# Allegro board prototype_board1_rev2.brd
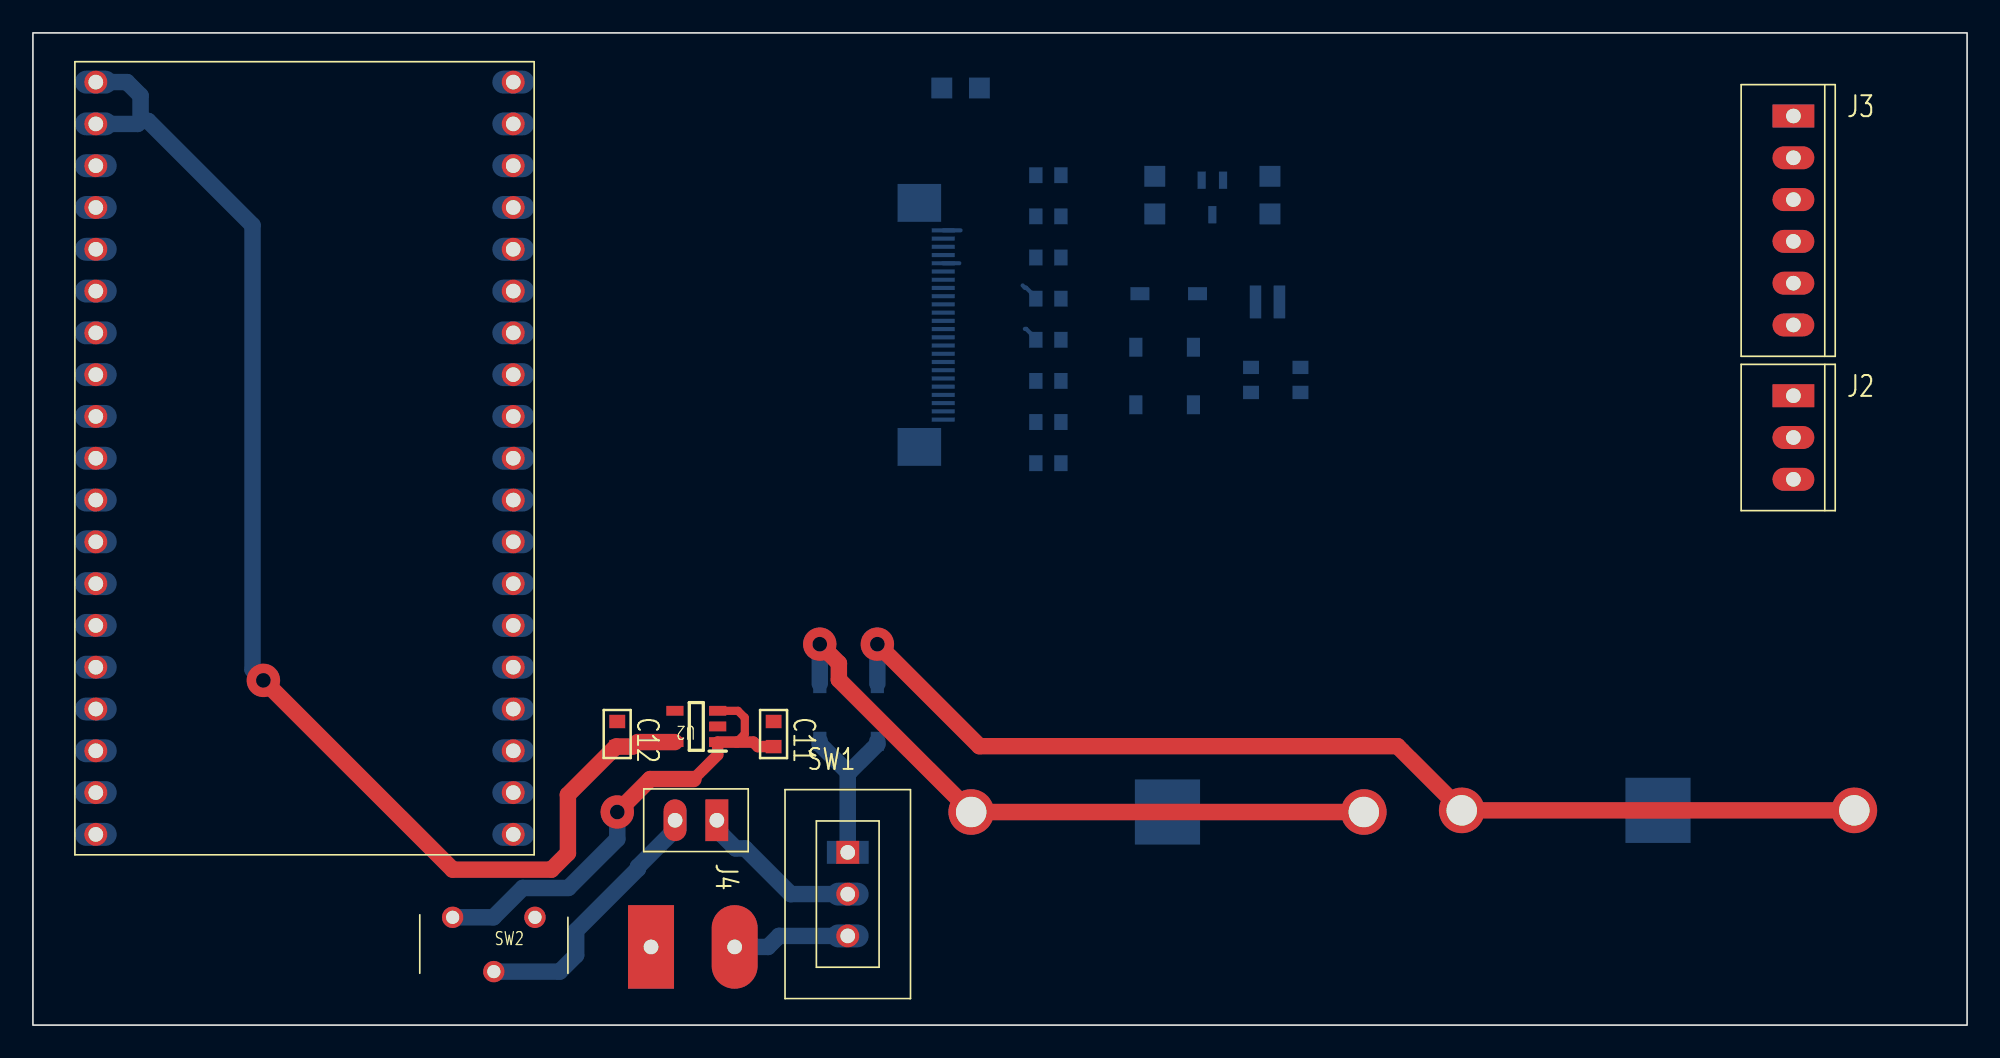
[diagram p0: board, top side]
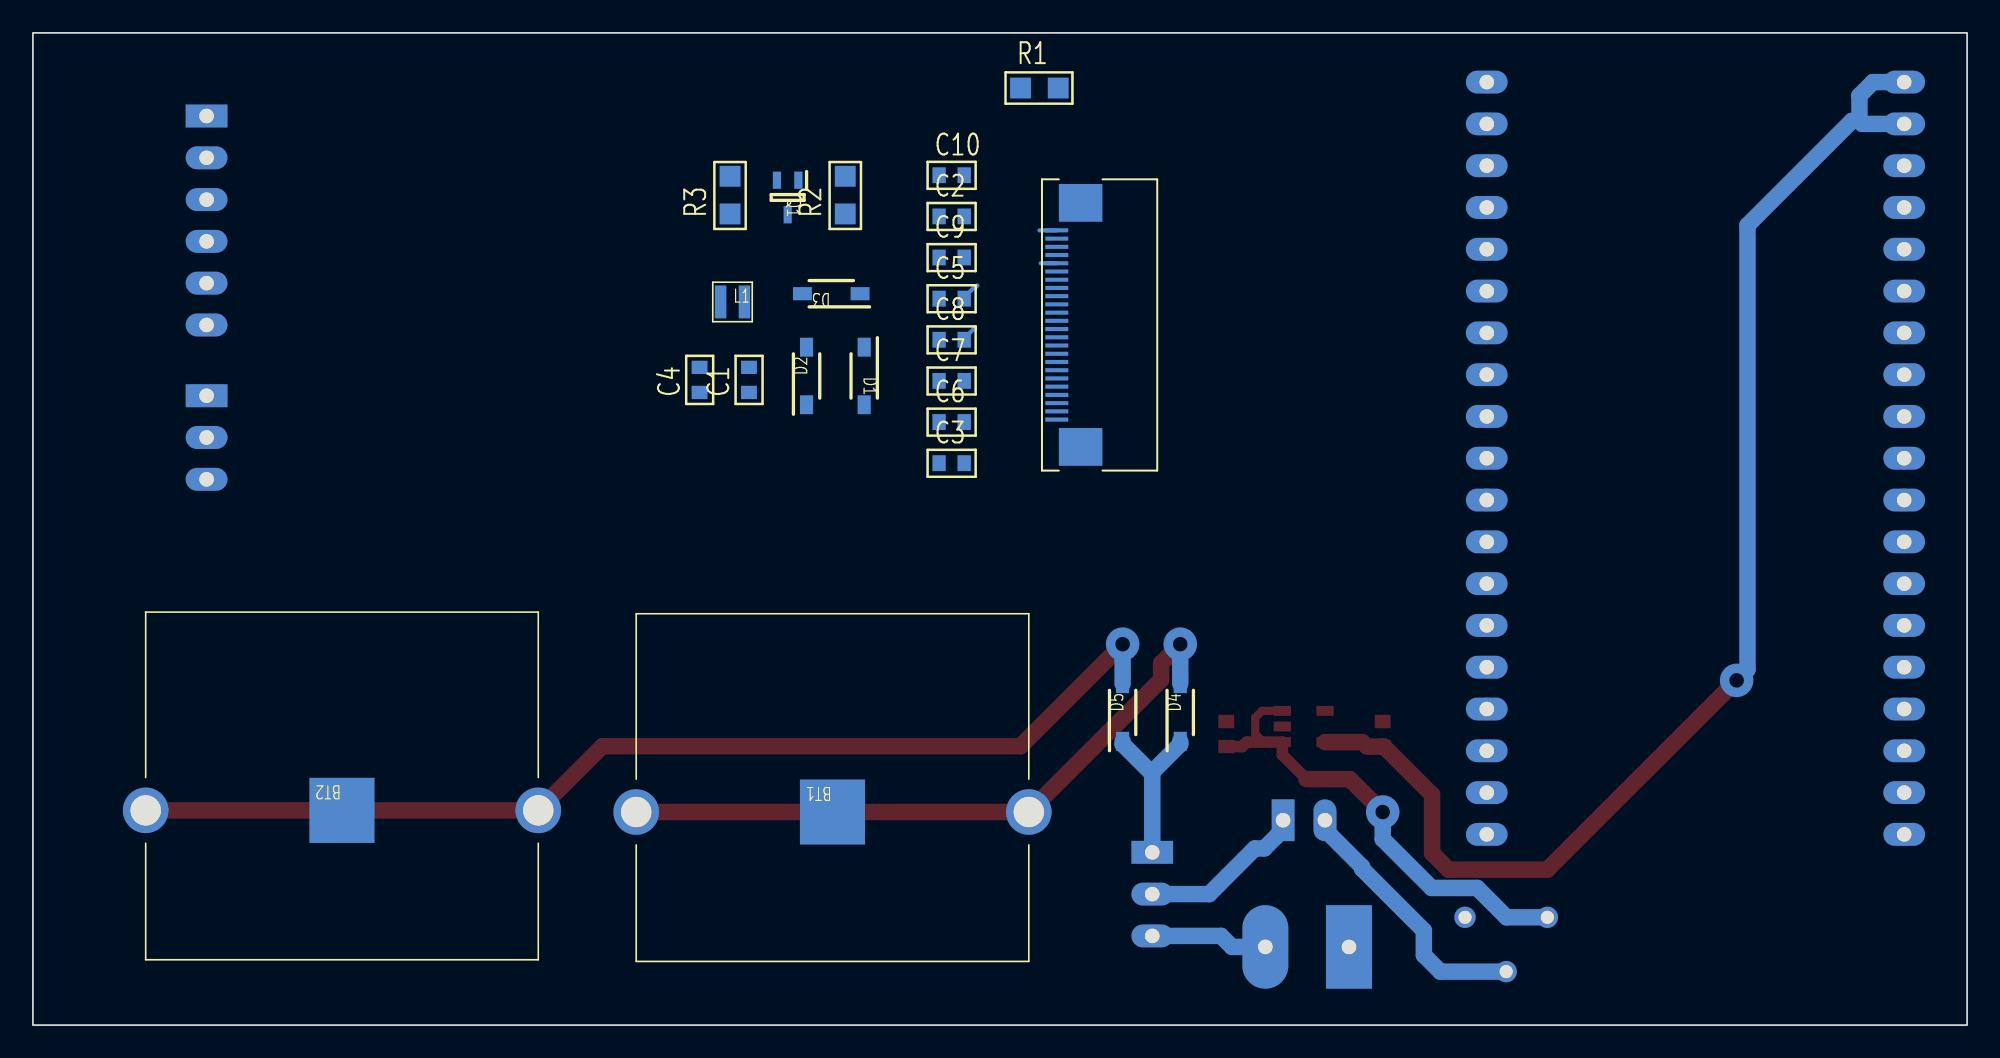
[diagram p1: board, bottom side, seen from below]

Outline 117.5 x 60.3 mm; copper layers: TOP, BOTTOM. Coordinates in mm from the lower left corner of the outline.
Outline path: rectangle 0,0 117.5,60.3

## Design rules (mm)
constraint set DEFAULT: min track width 0.254

## Placement (name value [footprint] x y rotation side)
BT1  Battery_Holder  [30212]  57 12.95 0 bottom
BT2  Battery_Holder  [30212]  86.8 13.05 0 bottom
C1  1u  [GU-C0603]  74 38.45 90 bottom
C2  1u / 50V  [GU-C0603]  62.45 49.15 180 bottom
C3  1u / 25V  [GU-C0603]  62.45 34.15 180 bottom
C4  4.7u  [GU-C0603]  77 38.45 90 bottom
C5  1u / 50V  [GU-C0603]  62.45 44.15 180 bottom
C6  1u / 25V  [GU-C0603]  62.45 36.65 180 bottom
C7  1u / 25V  [GU-C0603]  62.45 39.15 180 bottom
C8  1u / 25V  [GU-C0603]  62.45 41.65 180 bottom
C9  1u / 25V  [GU-C0603]  62.45 46.65 180 bottom
C10  1u / 25V  [GU-C0603]  62.45 51.65 180 bottom
C11  1u  [GU-C0603]  45 18.45 270 top
C12  1u  [GU-C0603]  35.5 18.45 270 top
D1  MBR0530T1  [SOD3716X135N]  67 39.45 270 bottom
D2  MBR0530T1  [SOD3716X135N]  70.5 39.45 90 bottom
D3  MBR0530T1  [SOD3716X135N]  69 44.45 0 bottom
D4  MBR0530T1  [SOD3716X135N]  47.8 19 90 bottom
D5  MBR0530T1  [SOD3716X135N]  51.3 19 90 bottom
J1  SFV24R-4STE1HLF  [AMPHENOL_SFV24R-4STE1HLF]  49.2 33.7 90 bottom
J2  VOLT TP  [GU-MOLEX3]  106.95 38.25 0 top
J3  SPI TP  [GU-MOLEX6]  106.95 55.25 0 top
J4  AMMETER TP  [GU-JUMPER2]  41.55 12.45 270 top
J5  EXT POWER  [GU-TERMINAL2-200]  37.55 4.75 90 top
L1  10uH  [NRH2412T2R2MNGH]  75 43.95 180 bottom
Q1  SI1308EDL-T1-BE3  [SOT65P210X110-3N]  71.65 50.3 270 bottom
R1  100k  [GU-R0805]  57.5 56.95 180 bottom
R2  10k  [GU-R0805]  68.15 49.3 90 bottom
R3  3R  [GU-R0805]  75.15 49.3 90 bottom
SW1  POWER SELECTOR  [GU-SW-SLIDE-SPDT]  49.5 10.5 0 top
SW2  -  [SSSS213100]  30.5 6.55 0 top
U1  ESP32-DevKitC  [ESP32-DEVKITC]  16.5 34.45 0 top
U2  MIC5317-3.3YM5-TR  [SOT95P280X100-5N]  40.3 18.15 180 top

## Library data of the parts
BT1 BT2 = Battery_Holder_9
C1-C12 = C
D1-D5 = MBR0530T1
J1 = SFV24R-4STE1HLF_0
J2 = CON3
J3 = CON6
J4 = JUMPER
J5 = CON2: User Part Number: TERMINAL2-200
L1 = L
Q1 = SI1308EDL-T1-BE3
R1-R3 = R
SW1 = SW SPDT
SW2 = SSSS213100
U1 = ESP32-DevKitC
U2 = MIC5317-3.3YM5-TR

## Footprints (pads in the part's own frame, mm; a bottom-side part is the same pattern mirrored in y, then rotated)
30212
  round 2.775 hole 1.85: 1(0,0) 2(23.85,0)
  rect 3.96x3.96 smd: NP1(11.925,0)
AMPHENOL_SFV24R-4STE1HLF
  rect 2.3x2.65 smd: (1.44,4.65) (16.27,4.65)
  rect 0.25x1.4 smd: 1(3.1,6.1) 2(3.6,6.1) 3(4.1,6.1) 4(4.6,6.1) 5(5.1,6.1) 6(5.6,6.1) 7(6.1,6.1) 8(6.6,6.1) 9(7.1,6.1) 10(7.6,6.1) 11(8.1,6.1) 12(8.6,6.1) 13(9.1,6.1) 14(9.6,6.1) 15(10.1,6.1) 16(10.6,6.1) 17(11.1,6.1) 18(11.6,6.1) 19(12.1,6.1) 20(12.6,6.1) 21(13.1,6.1) 22(13.6,6.1) 23(14.1,6.1) 24(14.6,6.1)
ESP32-DEVKITC
  round 1.397 hole 0.889: 1(-12.68,22.86) 2(-12.68,20.32) 3(-12.68,17.78) 4(-12.68,15.24) 5(-12.68,12.7) 6(-12.68,10.16) 7(-12.68,7.62) 8(-12.68,5.08) 9(-12.68,2.54) 10(-12.68,0) 11(-12.68,-2.54) 12(-12.68,-5.08) 13(-12.68,-7.62) 14(-12.68,-10.16) 15(-12.68,-12.7) 16(-12.68,-15.24) 17(-12.68,-17.78) 18(-12.68,-20.32) 19(-12.68,-22.86) 20(12.68,-22.86) 21(12.68,-20.32) 22(12.68,-17.78) 23(12.68,-15.24) 24(12.68,-12.7) 25(12.68,-10.16) 26(12.68,-7.62) 27(12.68,-5.08) 28(12.68,-2.54) 29(12.68,0) 30(12.68,2.54) 31(12.68,5.08) 32(12.68,7.62) 33(12.68,10.16) 34(12.68,12.7) 35(12.68,15.24) 36(12.68,17.78) 37(12.68,20.32) 38(12.68,22.86)
GU-C0603
  rect 0.813x0.965 smd: 1(0,0) 2(1.524,0)
GU-JUMPER2
  rect 2.54x1.397 hole 0.889: 1(0,0)
  oval 2.54x1.397 hole 0.889: 2(0,-2.54)
GU-MOLEX3
  rect 2.54x1.397 hole 0.889: 1(0,0)
  oval 2.54x1.397 hole 0.889: 2(0,-2.54) 3(0,-5.08)
GU-MOLEX6
  rect 2.54x1.397 hole 0.889: 1(0,0)
  oval 2.54x1.397 hole 0.889: 2(0,-2.54) 3(0,-5.08) 4(0,-7.62) 5(0,-10.16) 6(0,-12.7)
GU-R0805
  rect 1.27x1.27 smd: 1(0,0) 2(2.286,0)
GU-SW-SLIDE-SPDT
  rect 1.397x1.397 hole 0.889: 1(0,0)
  round 1.397 hole 0.889: 2(0,-2.54) 3(0,-5.08)
GU-TERMINAL2-200
  rect 5.08x2.794 hole 0.889: 1(0,0)
  oval 5.08x2.794 hole 0.889: 2(0,-5.08)
NRH2412T2R2MNGH
  rect 0.7x2 smd: 1(-0.725,0) 2(0.725,0)
SOD3716X135N
  rect 1.15x0.8 smd: 1(-1.75,0) 2(1.75,0)
SOT65P210X110-3N
  rect 1.05x0.5 smd: 1(-1.05,0.65) 2(-1.05,-0.65) 3(1.05,0)
SOT95P280X100-5N
  rect 1.05x0.6 smd: 1(-1.3,0.95) 2(-1.3,0) 3(-1.3,-0.95) 4(1.3,-0.95) 5(1.3,0.95)
SSSS213100
  round 1.3 hole 0.8: 1(0,0) 2(-2.5,-3.3) 3(-5,0)

## Nets
3V3: C4.2 C6.2 C12.2 J1.15 J1.16 J2.2 L1.1 R1.1 U1.1 U1.2 U2.5(VOUT)
GND: BT1.NP1 BT2.NP1 C2.1 C3.1 C4.1 C5.1 C6.1 C7.1 C8.1 C9.1 C10.1 C11.1 C12.1 D1.1(C) J1.8 J1.17 J2.1 J3.1 J5.1 R2.1 R3.1 U1.14 U1.32 U1.38 U2.2
VCC: C11.2 SW2.3(NO) U2.1 U2.3
BATT: D4.1(C) D5.1(C) J2.3 SW1.1
BUSY: J1.9 J3.4 U1.35
DC: J1.11 J3.5 U1.36
E-INK_CS: J1.12 J3.6 U1.29
EXT: J5.2 SW1.3(NO)
GDR: J1.2 Q1.1 R2.2
RESE: J1.3 Q1.2(S) R3.2
RESET: J1.10 R1.2 U1.34
SCL: J1.13 J3.2 U1.30
SDA: J1.14 J3.3 U1.37
VGH: C5.2 D3.1(C) J1.21
VGL: C2.2 D2.2 J1.23
N09940: C1.2 D3.2 L1.2 Q1.3
N26254: C1.1 D1.2 D2.1(C)
N26834: C10.2 J1.24
N27155: C9.2 J1.22
N27189: C8.2 J1.20
N27231: C7.2 J1.18
N27307: C3.2 J1.5
N33521: J4.1 SW1.2
N36276: J4.2 SW2.2
N72588: BT2.1 BT2.2 D5.2
N72605: BT1.1 BT1.2 D4.2

Pads without a net: J1 1 4 6 7 19; SW2 1; U1 3 4 5 6 7 8 9 10 11 12 13 15 16 17 18 19 20 21 22 23 24 25 26 27 28 31 33; U2 4

## Via types
v1: diameter 2.032, hole 0.889, TOP to BOTTOM, 4 vias

## Routing (per net, layer and track width the routed paths; a pad name or vN(x,y) marks a point on that pad's centre or on a via; arc(x,y) is an arc through that point)
3V3: length 79.8
  TOP w0.7: 36.46,16.93 36.73,17.2
  TOP w1: 36.73,17.2 U2.5 ; 36.46,16.93 C12.2 35.42,16.93 32.5,14 32.5,10.45 31.5,9.45 25.5,9.45 v1(14,20.95)
  BOTTOM w1: U1.2 6.36,54.77 6.54,54.95 ; v1(14,20.95) 13.34,21.61 13.34,48.61 7,54.95 6.54,54.95 ; 6.54,54.95 6.54,56.49 5.72,57.31 U1.1
VCC: length 28.9
  TOP w0.5: 42.75,17.2 43.24,17.7 43.24,18.69 42.83,19.1 U2.3
  TOP w0.7: 40.13,14.95 41.6,16.42 U2.1 43.77,17.2 44.04,16.93 C11.2
  TOP w1: 40.13,14.95 37.5,14.95 v1(35.5,12.95)
  BOTTOM w1: v1(35.5,12.95) 35.5,11.31 32.53,8.34 29.76,8.34 27.98,6.55 SW2.3
BATT: length 10.1
  BOTTOM w1: 49.5,15.37 47.8,17.07 D4.1 ; 49.5,15.37 49.6,15.37 51.3,17.07 D5.1 ; 49.5,15.37 SW1.1
EXT: length 7.1
  BOTTOM w1: SW1.3 45.32,5.42 44.65,4.75 J5.2
VGH: length 1.2
  BOTTOM w0.254: 60.13,44.95 60.26,44.81 60.34,44.81 60.93,44.23 C5.2
N26834: length 1
  BOTTOM w0.254: 56.35,48.3 J1.24
N27189: length 2
  BOTTOM w0.254: 60.26,42.31 60.34,42.31 60.93,41.73 C8.2 ; J1.20 56.28,46.3
N33521: length 10.1
  BOTTOM w1: SW1.2 46.04,7.96 43.26,10.74 42.69,10.74 41.55,11.88 J4.1
N36276: length 16.1
  BOTTOM w1: SW2.2 32,3.25 33,4.25 33,5.74 36.75,9.5 36.75,9.62 39.01,11.88 J4.2
N72588: length 65.9
  TOP w1: BT2.2 BT2.1 82.9,16.95 57.5,16.95 v1(51.3,23.15)
  BOTTOM w1: D5.2 v1(51.3,23.15)
N72605: length 40.3
  TOP w1: v1(47.8,23.15) 48.96,21.99 48.96,20.99 BT1.1 BT1.2
  BOTTOM w1: D4.2 v1(47.8,23.15)
